# Altium PCB 电子脚铐便携式主控板V3-改版V1.PcbDoc (part 2 of 3)
Units mm, origin at the board's own origin, x right, y up, seen from the top; angles counter-clockwise.
Board outline 54 x 105 mm, 2 copper layers (Top Layer, Bottom Layer), stack 1.271 mm thick; 103 components, 64 nets, 340 pads, 43 vias.
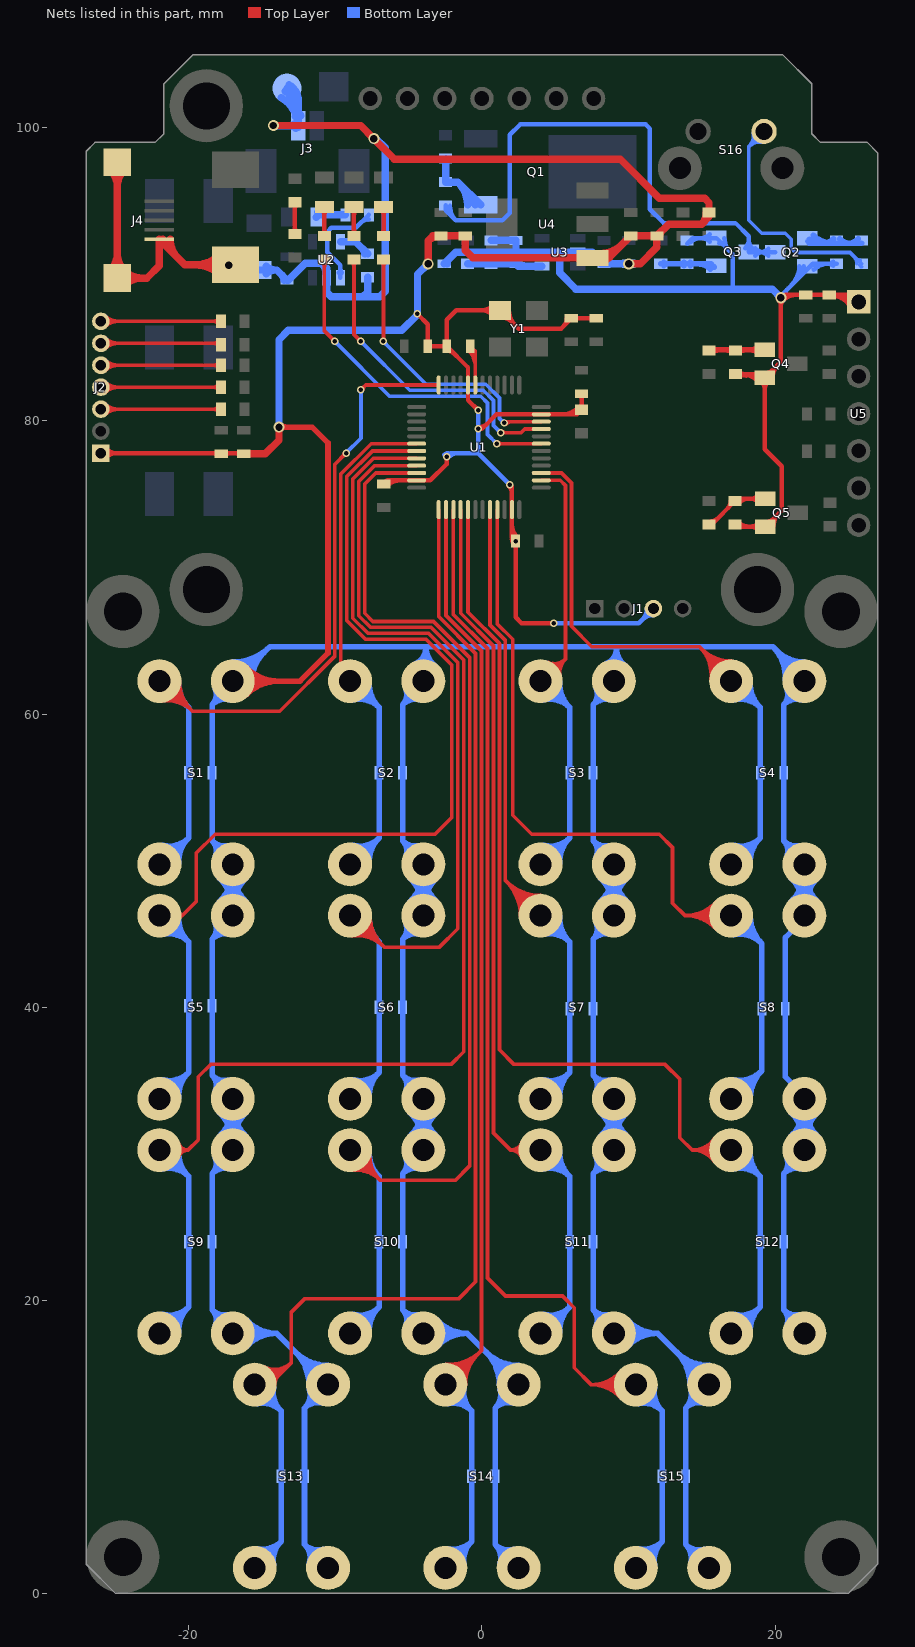
[diagram p2: the nets of this part, all layers, seen from the top]

## Via types
v1: diameter 0.508, hole 0.305, Top Layer to Bottom Layer, tented both sides, 29 vias
v2: diameter 0.762, hole 0.508, Top Layer to Bottom Layer, tented both sides, 14 vias

## Nets (pads, with @x,y where several pads share a name; then routed paths per layer and width w, separated by ;. In a path a pad name is that pad's centre, name@x,y a point inside that pad or via, vN(x,y) a via of type N, cw(c..) or ccw(c..) an arc to the next point about the centre after c; other vN are vias at no path point) (continued)
GND: C1.2 C2.2 C3.2 C4.2 C5.2 C6.2 C7.2 C8.2 C9.2 C10.2 C11.2 C12.2 C13.2 C14.2 C15.2 C16.2 C17.2 C18.2 C19.2 C20.2 C21.2 C22.2 C23.2 C24.2 C25.1 C26.2 C27.1 C28.2 C29.2 C30.2 C31.2 C32.2 C33.2 C34.2 C35.2 C36.1 D5.2 J1.3 J2.1 J3.2 J4.5 pad.@-13.3,102.7 Q2.2 Q3.2 Q4.2 Q5.2 R6.2 R13.1 R17.2 R19.2 R22.2 R23.2 R29.1 R31.1 S1.1 S2.1 S3.1 S4.1 S5.1 S6.1 S7.1 S8.1 S9.1 S10.1 S11.1 S12.1 S13.1 S14.1 S15.1 U1.8 U1.23 U1.35 U1.47 U2.2 U3.2 U4.1 U5.1 Y1.2 | length 1061.7
  Top Layer w0.305: J2.1@-26,77.8 C7.2@-16.4,77.8 ; J2.1@-25.683,77.484 cw(c-24.919,76.719) -24.919,77.8 cw(c-24.919,78.881) J2.1@-25.683,78.117 ; -18.368,77.8 cw(c-18.368,77.328) C6.2@-18.034,77.662 ; C6.2@-17.526,77.662 cw(c-17.192,77.328) -17.192,77.8 ; -16.844,77.8 cw(c-16.844,77.328) C7.2@-16.51,77.662 ; C4.2@-6.7,75.7 -6.45,75.95 U1.23@-4.45,75.95 -3.517,75.95 -2.413,77.054 v1(-2.413,77.55) ; C4.2@-6.661,75.811 cw(c-6.326,75.476) C4.2@-6.326,75.95 ; C4.2@-6.446,75.596 cw(c-5.59,74.74) -5.59,75.95 ; v1(-4.4,87.3) -3.7,86.6 C3.2@-3.7,85.1 C5.2@-2.4,85.1 ; C3.2@-3.804,85.354 ccw(c-4.056,85.606) -3.7,85.606 ccw(c-3.344,85.606) C3.2@-3.596,85.354 ; C3.2@-3.596,84.996 cw(c-3.344,84.744) -3.344,85.1 cw(c-3.344,85.456) C3.2@-3.596,85.204 ; C5.2@-2.504,84.996 ccw(c-2.756,84.744) -2.756,85.1 ccw(c-2.756,85.456) C5.2@-2.504,85.204 ; C5.2@-2.504,85.354 ccw(c-2.756,85.606) -2.4,85.606 ccw(c-2.044,85.606) C5.2@-2.296,85.354 ; C5.2@-2.4,84.802 cw(c-2.4,84.084) -1.892,84.592 ; v1(-0.254,79.455) 0,79.455 0.995,80.45 U1.47@4.05,80.45 6.488,80.45 R6.2@6.8,80.762 C1.2@6.8,81.862 ; v1@-0.254,79.557 ccw(c-0.254,80.415) 0.353,79.808 ; v1(-0.254,80.725) -0.95,81.421 U1.8@-0.95,82.45 -0.95,83.65 C5.2@-2.4,85.1 ; Y1.2@0.798,87.198 ccw(c-0.051,86.349) -0.051,87.55 ccw(c-0.051,88.751) Y1.2@0.798,87.902 ; Y1.2@1.35,87.052 cw(c1.35,86.093) 2.029,86.771 ; v1@1.833,75.573 cw(c1.31,75.05) 2.05,75.05 ; Y1.2@1.848,87.55 ccw(c3.29,87.55) 2.27,86.53 ; v1(1.905,75.645) 2.05,75.5 U1.35@2.05,73.95 2.05,72.05 v1(2.3,71.8) 2.3,66.6 2.7,66.2 v1(4.9,66.2) ; C2.2@2.044,72.09 ccw(c2.382,72.285) C2.2@2.317,71.9 ; C2.2@2.05,71.913 ccw(c2.413,71.913) C2.2@2.156,71.656 ; C2.2@2.05,72.174 ccw(c2.524,72.174) C2.2@2.189,71.839 ; 2.05,72.649 ccw(c3.149,72.649) C2.2@2.372,71.872 ; 2.05,72.91 ccw(c3.26,72.91) C2.2@2.404,72.054 ; C2.2@2.196,71.546 cw(c1.944,71.294) 2.3,71.294 cw(c2.656,71.294) C2.2@2.404,71.546 ; 5.47,80.45 ccw(c5.47,81.992) R6.2@6.56,80.902 ; 5.592,86.492 ccw(c5.084,87) C36.1@5.802,87 ; 6.206,80.45 ccw(c6.206,81.256) R6.2@6.776,80.686 ; C36.1@6.354,86.896 cw(c6.606,86.644) 6.606,87 cw(c6.606,87.356) C36.1@6.354,87.104 ; R6.2@6.66,80.902 ccw(c6.323,81.239) 6.8,81.239 ccw(c7.277,81.239) R6.2@6.94,80.902 ; C1.2@6.696,81.758 cw(c6.444,81.506) 6.8,81.506 cw(c7.156,81.506) C1.2@6.904,81.758 ; C25.1@7.546,86.896 ccw(c7.294,86.644) 7.294,87 ccw(c7.294,87.356) C25.1@7.546,87.104 ; C25.1@7.8,87 C36.1@6.1,87 5.4,86.3 2.5,86.3 Y1.2@1.25,87.55 -1.75,87.55 -2.4,86.9 C5.2@-2.4,85.1 ; R31.1@17.272,72.94 17.422,72.79 Q5.2@19.347,72.79 20.447,73.89 20.447,76.915 19.3,78.062 Q4.2@19.3,82.95 20.4,84.05 v2@20.4,88.298 ; R29.1@17.3,83.2 Q4.2@19.05,83.2 ; R29.1@17.499,83.029 cw(c17.851,82.419) 18.033,83.099 ; R31.1@17.512,73.08 ccw(c18.211,73.779) 18.211,72.79 ; R29.1@17.54,83.06 cw(c17.877,82.723) 17.877,83.2 cw(c17.877,83.677) R29.1@17.54,83.34 ; R29.1@17.657,83.2 cw(c17.657,81.507) Q4.2@18.854,82.704 ; 18.393,83.2 cw(c18.393,82.243) Q4.2@19.07,82.92 ; Q5.2@18.901,72.544 ccw(c18.308,71.951) 18.308,72.79 ccw(c18.308,73.629) Q5.2@18.901,73.036 ; Q4.2@19.054,82.704 cw(c18.461,82.111) 19.3,82.111 cw(c20.139,82.111) Q4.2@19.546,82.704 ; Q4.2@19.5,83.298 ccw(c19.5,83.654) Q4.2@19.752,83.402 ; Q5.2@19.547,73.138 ccw(c19.547,73.494) Q5.2@19.799,73.242 ; Q4.2@19.848,82.95 cw(c21.17,82.95) 20.235,83.885 ; Q5.2@19.895,72.79 cw(c21.217,72.79) 20.282,73.725 ; v2@20.238,88.238 cw(c19.848,87.848) 20.4,87.848 cw(c20.952,87.848) 20.562,88.238 cw(c21.435,87.365) 21.435,88.6 ; v2@20.702,88.6 C34.2@22.1,88.6 C35.2@23.7,88.6 ; C34.2@21.846,88.496 ccw(c21.594,88.244) 21.594,88.6 ccw(c21.594,88.956) C34.2@21.846,88.704 ; C34.2@22.354,88.496 cw(c22.606,88.244) 22.606,88.6 cw(c22.606,88.956) C34.2@22.354,88.704 ; C35.2@23.446,88.496 ccw(c23.194,88.244) 23.194,88.6 ccw(c23.194,88.956) C35.2@23.446,88.704 ; C35.2@23.954,88.496 cw(c24.206,88.244) 24.206,88.6 cw(c24.206,88.956) C35.2@23.954,88.704 ; 24.241,88.6 cw(c24.241,87.237) U5.1@25.407,87.943 ; 24.781,88.6 cw(c24.781,87.564) U5.1@25.667,88.1 ; U5.1@25.146,87.785 ccw(c23.7,86.91) C35.2@23.7,88.6 ; U5.1@25.7,88.12 25.22,88.6 C35.2@23.7,88.6
  Top Layer w0.381: S1.1@-16.808,62.25 -12.415,62.25 -10.502,64.163 -10.502,78.502 -11.582,79.582 v2(-13.843,79.582) ; S1.1@-16.343,61.593 cw(c-14.758,60.008) -14.758,62.25 cw(c-14.758,64.492) S1.1@-16.343,62.907 ; S1.1@-16.074,61.324 cw(c-13.839,59.089) -13.839,62.25 cw(c-13.839,65.411) S1.1@-16.074,63.176 ; v2@-13.708,79.447 cw(c-13.383,79.122) -13.383,79.582 cw(c-13.383,80.042) v2@-13.708,79.717
  Top Layer w0.508: J4.5@-25.371,90.242 ccw(c-26.559,91.43) -24.879,91.43 ccw(c-23.199,91.43) -24.387,90.242 ccw(c-23.199,91.43) -23.199,89.75 ccw(c-23.199,88.07) J4.5@-24.387,89.258 ; J4.5@-25.371,97.158 cw(c-26.559,95.97) -24.879,95.97 cw(c-23.199,95.97) J4.5@-24.387,97.158 ; J4.5@-24.879,97.65 J4.5@-24.879,89.75 -22.85,89.75 -22.004,90.596 J4.5@-22.004,92.383 ; J4.5@-22.021,92.4 J4.5@-22.004,92.383 ; J4.5@-21.783,92.4 ccw(c-21.208,92.4) -21.615,91.994 ; J4.5@-21.275,92.4 ccw(c-19.474,92.4) -20.748,91.126 ; D5.2@-17.854,89.946 ccw(c-19.555,88.245) -19.555,90.65 ccw(c-19.555,93.055) D5.2@-17.854,91.354 ; D5.2@-16.8,90.65 -20.271,90.65 J4.5@-22.004,92.383 ; C7.2@-16.256,77.766 -14.77,77.766 -13.843,78.693 v2(-13.843,79.582) ; v2(-14.224,100.156) -8.255,100.156 v2(-7.366,99.267) -5.969,97.87 9.43,97.87 12.1,95.2 15.194,95.2 15.494,94.9 R23.2@15.494,94.225 15.494,93.933 14.986,93.425 ; v2(-3.671,90.719) -3.671,92.294 ; C32.2@-2.946,92.579 ccw(c-2.981,91.604) -3.671,92.294 ; C33.2@-1.359,92.625 C32.2@-2.794,92.625 -3.34,92.625 -3.671,92.294 ; C33.2@-1.143,92.625 -1.143,91.647 -0.621,91.125 U4.1@7.545,91.125 8.66,91.125 ; U4.1@6.811,90.916 ccw(c6.305,90.41) 6.305,91.125 ccw(c6.305,91.84) U4.1@6.811,91.334 ; U4.1@8.07,90.913 ccw(c8.07,91.826) 8.715,91.18 ; U4.1@8.07,91.421 ccw(c8.07,93.56) 9.583,92.047 ; U4.1@8.307,90.948 cw(c8.66,90.685) 8.66,91.125 ; U4.1@8.307,91.302 ccw(c8.66,91.565) 8.66,91.125 ; 9.825,92.29 ccw(c9.491,92.625) C31.2@9.964,92.625 ; v2(10.024,90.719) 10.819,90.719 11.938,91.838 C30.2@11.938,92.625 ; C30.2@12.134,92.625 cw(c12.607,92.625) 12.273,92.96 ; R23.2@15.298,94.221 cw(c14.231,94.18) 14.986,93.425 ; v2@20.4,88.298 v2(20.4,88.4) ; 8.66,91.125 C31.2@10.16,92.625 C30.2@11.938,92.625 ; C30.2@11.938,92.625 12.738,93.425 14.986,93.425
  Bottom Layer w0.305: v1@-2.557,77.694 cw(c-2.29,77.427) -2.29,77.804 ; v1(-2.413,77.55) -2.159,77.804 -0.254,77.804 ; v1@-2.341,77.478 cw(c-1.555,76.692) -1.555,77.804 ; v1(-0.254,80.725) v1(-0.254,79.455) -0.254,77.804 ; v1(1.905,75.645) -0.254,77.804 ; v1(4.9,66.2) 10.7,66.2 J1.3@11.7,67.2 ; J1.3@11.252,67.2 cw(c10.172,67.2) 10.936,66.436 cw(c11.7,65.672) J1.3@11.7,66.752 ; R19.2@14,92.1 14.381,92.481 Q3.2@16,92.481 17.1,91.381 17.1,89 ; R19.2@14.24,92.179 cw(c14.967,91.452) 14.967,92.481 ; Q3.2@15.554,92.235 ccw(c14.961,91.641) 14.961,92.481 ccw(c14.961,93.32) Q3.2@15.554,92.726 ; Q3.2@16.2,92.133 cw(c16.2,91.777) Q3.2@16.452,92.029 ; Q3.2@16.548,92.481 ccw(c17.87,92.481) 16.935,91.546 ; v2(20.4,88.4) 20.4,88.55 22.569,90.719 R17.2@24.2,90.719 ; v2@20.629,88.4 cw(c21.543,88.4) 20.896,89.046 ; 21.119,89.269 ccw(c19.83,90.557) Q2.2@21.652,90.557 ; 21.639,89.789 ccw(c20.87,90.557) Q2.2@21.957,90.557 ; Q2.2@22.43,90.527 cw(c22.893,90.064) Q2.2@22.893,90.719 ; Q2.2@22.646,90.312 cw(c23.629,89.328) 23.629,90.719 ; R17.2@23.96,90.579 ccw(c23.623,90.242) 23.623,90.719 ccw(c23.623,91.196) R17.2@23.96,90.859
  Bottom Layer w0.381: S9.1@-18.203,18.267 ccw(c-19.11,18.656) -18.412,19.354 ; S9.1@-18.203,29.733 cw(c-19.11,29.344) -18.412,28.646 ; S5.1@-18.203,34.267 ccw(c-19.11,34.656) -18.412,35.354 ; S5.1@-18.203,45.733 cw(c-19.11,45.344) -18.412,44.646 ; S1.1@-18.203,50.267 ccw(c-19.11,50.656) -18.412,51.354 ; S1.1@-18.203,61.733 cw(c-19.11,61.344) -18.412,60.646 ; -18.014,18.956 cw(c-18.553,18.417) S9.1@-17.853,18.117 ; -18.014,29.044 ccw(c-18.553,29.583) S9.1@-17.853,29.883 ; -18.014,34.956 cw(c-18.553,34.417) S5.1@-17.853,34.117 ; -18.014,45.044 ccw(c-18.553,45.583) S5.1@-17.853,45.883 ; -18.014,50.956 cw(c-18.553,50.417) S1.1@-17.853,50.117 ; -18.014,61.044 ccw(c-18.553,61.583) S1.1@-17.853,61.883 ; S9.1@-17.926,31.176 ccw(c-20.161,33.411) -17,33.411 ccw(c-13.839,33.411) S9.1@-16.074,31.176 ; S5.1@-17.926,32.824 cw(c-20.161,30.589) -17,30.589 cw(c-13.839,30.589) S5.1@-16.074,32.824 ; S5.1@-17.926,47.176 ccw(c-20.161,49.411) -17,49.411 ccw(c-13.839,49.411) S5.1@-16.074,47.176 ; S1.1@-17.926,48.824 cw(c-20.161,46.589) -17,46.589 cw(c-13.839,46.589) S1.1@-16.074,48.824 ; S9.1@-17.657,30.907 ccw(c-19.242,32.492) -17,32.492 ccw(c-14.758,32.492) S9.1@-16.343,30.907 ; S5.1@-17.657,33.093 cw(c-19.242,31.508) -17,31.508 cw(c-14.758,31.508) S5.1@-16.343,33.093 ; S5.1@-17.657,46.907 ccw(c-19.242,48.492) -17,48.492 ccw(c-14.758,48.492) S5.1@-16.343,46.907 ; S1.1@-17.657,49.093 cw(c-19.242,47.508) -17,47.508 cw(c-14.758,47.508) S1.1@-16.343,49.093 ; S9.1@-17.649,31.387 ccw(c-17.929,31.877) -17.384,32.023 ccw(c-16.762,32.189) S9.1@-16.84,31.55 ; S5.1@-17.649,47.387 ccw(c-17.929,47.877) -17.384,48.023 ccw(c-16.762,48.189) S5.1@-16.84,47.55 ; S9.1@-17.466,31.474 ccw(c-17.649,31.952) -17.154,32.084 ccw(c-16.333,32.304) S9.1@-16.595,31.495 ; S5.1@-17.466,47.474 ccw(c-17.649,47.952) -17.154,48.084 ccw(c-16.333,48.304) S5.1@-16.595,47.495 ; S9.1@-17.404,31.495 ccw(c-17.667,32.304) -16.846,32.084 ccw(c-16.351,31.952) S9.1@-16.534,31.474 ; S5.1@-17.404,47.495 ccw(c-17.667,48.304) -16.846,48.084 ccw(c-16.351,47.952) S5.1@-16.534,47.474 ; S9.1@-17.287,19.028 cw(c-17.553,20.213) -18.412,19.354 ; S9.1@-17.287,28.972 ccw(c-17.553,27.787) -18.412,28.646 ; S5.1@-17.287,35.028 cw(c-17.553,36.213) -18.412,35.354 ; S5.1@-17.287,44.972 ccw(c-17.553,43.787) -18.412,44.646 ; S1.1@-17.287,51.028 cw(c-17.553,52.213) -18.412,51.354 ; S1.1@-17.287,60.972 ccw(c-17.553,59.787) -18.412,60.646 ; S9.1@-17.16,31.55 ccw(c-17.238,32.189) -16.616,32.023 ccw(c-16.071,31.877) S9.1@-16.351,31.387 ; S5.1@-17.16,47.55 ccw(c-17.238,48.189) -16.616,48.023 ccw(c-16.071,47.877) S5.1@-16.351,47.387 ; S9.1@-17,17.75 S9.1@-16.808,17.75 ; S9.1@-17,30.25 S5.1@-17,33.75 ; S5.1@-17,46.25 -17,49.558 -16.808,49.75 -18.412,51.354 ; S1.1@-16.997,62.797 ccw(c-16.986,64.548) -15.748,63.31 ; S1.1@-16.994,63.178 ccw(c-16.978,65.83) -15.103,63.955 ; S1.1@-16.992,63.559 ccw(c-16.97,67.112) -14.458,64.6 ; S9.1@-16.808,30.25 -18.412,28.646 ; S5.1@-16.808,33.75 -18.412,35.354 ; S5.1@-16.808,46.25 -18.412,44.646 ; S9.1@-16.319,17.119 cw(c-14.873,15.778) -14.873,17.75 cw(c-14.873,19.722) S9.1@-16.319,18.381 ; S1.1@-16.071,62.25 cw(c-14.293,62.25) -15.551,63.507 ; S9.1@-16.04,16.86 cw(c-14,14.969) -14,17.75 ; S9.1@-16.04,18.64 ccw(c-14,20.531) -14,17.75 ; S1.1@-15.69,62.25 cw(c-12.993,62.25) -14.9,64.158 ; S13.1@-11.809,14.25 ccw(c-14.971,14.25) -12.735,16.485 ccw(c-10.5,18.721) S13.1@-10.5,15.56 ; S13.1@-11.765,2.089 ccw(c-13.03,2.428) -12.104,3.354 ; S13.1@-11.765,13.911 cw(c-13.03,13.572) -12.104,12.646 cw(c-11.178,11.72) S13.1@-10.839,12.985 ; S13.1@-11.428,14.25 ccw(c-13.67,14.25) -12.085,15.835 ccw(c-10.5,17.42) S13.1@-10.5,15.179 ; S13.1@-11.397,1.99 ccw(c-12.294,2.231) -11.637,2.887 ccw(c-10.981,3.544) S13.1@-10.74,2.647 ; S13.1@-11.397,14.01 cw(c-12.294,13.769) -11.637,13.113 cw(c-10.981,12.456) S13.1@-10.74,13.353 ; S13.1@-10.839,3.015 cw(c-11.178,4.28) -12.104,3.354 ; S13.1@-10.5,1.75 -12.104,3.354 ; S10.1@-5.203,18.267 ccw(c-6.11,18.656) -5.412,19.354 ; S10.1@-5.203,29.733 cw(c-6.11,29.344) -5.412,28.646 ; S6.1@-5.203,34.267 ccw(c-6.11,34.656) -5.412,35.354 ; S6.1@-5.203,45.733 cw(c-6.11,45.344) -5.412,44.646 ; S2.1@-5.203,50.267 ccw(c-6.11,50.656) -5.412,51.354 ; S2.1@-5.203,61.733 cw(c-6.11,61.344) -5.412,60.646 ; -5.014,18.956 cw(c-5.553,18.417) S10.1@-4.853,18.117 ; -5.014,29.044 ccw(c-5.553,29.583) S10.1@-4.853,29.883 ; -5.014,34.956 cw(c-5.553,34.417) S6.1@-4.853,34.117 ; -5.014,45.044 ccw(c-5.553,45.583) S6.1@-4.853,45.883 ; -5.014,50.956 cw(c-5.553,50.417) S2.1@-4.853,50.117 ; -5.014,61.044 ccw(c-5.553,61.583) S2.1@-4.853,61.883 ; S10.1@-4.926,31.176 ccw(c-7.161,33.411) -4,33.411 ccw(c-0.839,33.411) S10.1@-3.074,31.176 ; S6.1@-4.926,32.824 cw(c-7.161,30.589) -4,30.589 cw(c-0.839,30.589) S6.1@-3.074,32.824 ; S6.1@-4.926,47.176 ccw(c-7.161,49.411) -4,49.411 ccw(c-0.839,49.411) S6.1@-3.074,47.176 ; S2.1@-4.926,48.824 cw(c-7.161,46.589) -4,46.589 cw(c-0.839,46.589) S2.1@-3.074,48.824 ; S10.1@-4.657,30.907 ccw(c-6.242,32.492) -4,32.492 ccw(c-1.758,32.492) S10.1@-3.343,30.907 ; S6.1@-4.657,33.093 cw(c-6.242,31.508) -4,31.508 cw(c-1.758,31.508) S6.1@-3.343,33.093 ; S6.1@-4.657,46.907 ccw(c-6.242,48.492) -4,48.492 ccw(c-1.758,48.492) S6.1@-3.343,46.907 ; S2.1@-4.657,49.093 cw(c-6.242,47.508) -4,47.508 cw(c-1.758,47.508) S2.1@-3.343,49.093 ; S10.1@-4.649,31.387 ccw(c-4.929,31.877) -4.384,32.023 ccw(c-3.762,32.189) S10.1@-3.84,31.55 ; S6.1@-4.649,47.387 ccw(c-4.929,47.877) -4.384,48.023 ccw(c-3.762,48.189) S6.1@-3.84,47.55 ; S2.1@-4.547,63.44 ccw(c-5.076,64.592) -3.808,64.592 ; S10.1@-4.466,31.474 ccw(c-4.649,31.952) -4.154,32.084 ccw(c-3.333,32.304) S10.1@-3.595,31.495 ; S6.1@-4.466,47.474 ccw(c-4.649,47.952) -4.154,48.084 ccw(c-3.333,48.304) S6.1@-3.595,47.495 ; S10.1@-4.404,31.495 ccw(c-4.667,32.304) -3.846,32.084 ccw(c-3.351,31.952) S10.1@-3.534,31.474 ; S6.1@-4.404,47.495 ccw(c-4.667,48.304) -3.846,48.084 ccw(c-3.351,47.952) S6.1@-3.534,47.474 ; S2.1@-4.388,63.094 ccw(c-4.803,63.998) -3.808,63.998 ; S10.1@-4.287,19.028 cw(c-4.553,20.213) -5.412,19.354 ; S10.1@-4.287,28.972 ccw(c-4.553,27.787) -5.412,28.646 ; S6.1@-4.287,35.028 cw(c-4.553,36.213) -5.412,35.354 ; S6.1@-4.287,44.972 ccw(c-4.553,43.787) -5.412,44.646 ; S2.1@-4.287,51.028 cw(c-4.553,52.213) -5.412,51.354 ; S2.1@-4.287,60.972 ccw(c-4.553,59.787) -5.412,60.646 ; S10.1@-4.16,31.55 ccw(c-4.238,32.189) -3.616,32.023 ccw(c-3.071,31.877) S10.1@-3.351,31.387 ; S6.1@-4.16,47.55 ccw(c-4.238,48.189) -3.616,48.023 ccw(c-3.071,47.877) S6.1@-3.351,47.387 ; S10.1@-4,17.75 S10.1@-3.808,17.75 ; S10.1@-4,30.25 S6.1@-4,33.75 ; S6.1@-4,46.25 -4,49.558 -3.808,49.75 -5.412,51.354 ; S10.1@-3.808,30.25 -5.412,28.646 ; S6.1@-3.808,33.75 -5.412,35.354 ; S6.1@-3.808,46.25 -5.412,44.646 ; -3.808,63.793 ccw(c-2.751,63.793) S2.1@-3.416,62.972 ; S10.1@-3.319,17.119 cw(c-1.873,15.778) -1.873,17.75 cw(c-1.873,19.722) S10.1@-3.319,18.381 ; S2.1@-3.176,63.268 cw(c-2.105,64.592) -3.808,64.592 ; S10.1@-3.04,16.86 cw(c-1,14.969) -1,17.75 cw(c-1,20.531) S10.1@-3.04,18.64 ; S14.1@1.191,14.25 ccw(c-1.971,14.25) 0.265,16.485 ccw(c2.5,18.721) S14.1@2.5,15.56 ; S14.1@1.235,2.089 ccw(c-0.03,2.428) 0.896,3.354 ; S14.1@1.235,13.911 cw(c-0.03,13.572) 0.896,12.646 cw(c1.822,11.72) S14.1@2.161,12.985 ; S14.1@1.572,14.25 ccw(c-0.67,14.25) 0.915,15.835 ccw(c2.5,17.42) S14.1@2.5,15.179 ; S14.1@1.603,1.99 ccw(c0.706,2.231) 1.363,2.887 ccw(c2.019,3.544) S14.1@2.26,2.647 ; S14.1@1.603,14.01 cw(c0.706,13.769) 1.363,13.113 cw(c2.019,12.456) S14.1@2.26,13.353 ; S14.1@2.161,3.015 cw(c1.822,4.28) 0.896,3.354 ; S14.1@2.5,1.75 0.896,3.354 ; S11.1@7.797,18.267 ccw(c6.89,18.656) 7.588,19.354 ; S11.1@7.797,29.733 cw(c6.89,29.344) 7.588,28.646 ; S7.1@7.797,34.267 ccw(c6.89,34.656) 7.588,35.354 ; S7.1@7.797,45.733 cw(c6.89,45.344) 7.588,44.646 ; S3.1@7.797,50.267 ccw(c6.89,50.656) 7.588,51.354 ; S3.1@7.797,61.733 cw(c6.89,61.344) 7.588,60.646 ; 7.986,18.956 cw(c7.447,18.417) S11.1@8.147,18.117 ; 7.986,29.044 ccw(c7.447,29.583) S11.1@8.147,29.883 ; 7.986,34.956 cw(c7.447,34.417) S7.1@8.147,34.117 ; 7.986,45.044 ccw(c7.447,45.583) S7.1@8.147,45.883 ; 7.986,50.956 cw(c7.447,50.417) S3.1@8.147,50.117 ; 7.986,61.044 ccw(c7.447,61.583) S3.1@8.147,61.883 ; S11.1@8.074,31.176 ccw(c5.839,33.411) 9,33.411 ccw(c12.161,33.411) S11.1@9.926,31.176 ; S7.1@8.074,32.824 cw(c5.839,30.589) 9,30.589 cw(c12.161,30.589) S7.1@9.926,32.824 ; S7.1@8.074,47.176 ccw(c5.839,49.411) 9,49.411 ccw(c12.161,49.411) S7.1@9.926,47.176 ; S3.1@8.074,48.824 cw(c5.839,46.589) 9,46.589 cw(c12.161,46.589) S3.1@9.926,48.824 ; S11.1@8.343,30.907 ccw(c6.758,32.492) 9,32.492 ccw(c11.242,32.492) S11.1@9.657,30.907 ; S7.1@8.343,33.093 cw(c6.758,31.508) 9,31.508 cw(c11.242,31.508) S7.1@9.657,33.093 ; S7.1@8.343,46.907 ccw(c6.758,48.492) 9,48.492 ccw(c11.242,48.492) S7.1@9.657,46.907 ; S3.1@8.343,49.093 cw(c6.758,47.508) 9,47.508 cw(c11.242,47.508) S3.1@9.657,49.093 ; S11.1@8.351,31.387 ccw(c8.071,31.877) 8.616,32.023 ccw(c9.238,32.189) S11.1@9.16,31.55 ; S7.1@8.351,47.387 ccw(c8.071,47.877) 8.616,48.023 ccw(c9.238,48.189) S7.1@9.16,47.55 ; S3.1@8.501,63.461 ccw(c8.077,64.492) 9.192,64.492 ; S11.1@8.534,31.474 ccw(c8.351,31.952) 8.846,32.084 ccw(c9.667,32.304) S11.1@9.405,31.495 ; S7.1@8.534,47.474 ccw(c8.351,47.952) 8.846,48.084 ccw(c9.667,48.304) S7.1@9.405,47.495 ; S11.1@8.595,31.495 ccw(c8.333,32.304) 9.154,32.084 ccw(c9.649,31.952) S11.1@9.466,31.474 ; S7.1@8.596,47.495 ccw(c8.333,48.304) 9.154,48.084 ccw(c9.649,47.952) S7.1@9.466,47.474 ; S3.1@8.647,63.109 ccw(c8.311,63.923) 9.192,63.923 ; S11.1@8.713,19.028 cw(c8.447,20.213) 7.588,19.354 ; S11.1@8.713,28.972 ccw(c8.447,27.787) 7.588,28.646 ; S7.1@8.713,35.028 cw(c8.447,36.213) 7.588,35.354 ; S7.1@8.713,44.972 ccw(c8.447,43.787) 7.588,44.646 ; S3.1@8.713,51.028 cw(c8.447,52.213) 7.588,51.354 ; S3.1@8.713,60.972 ccw(c8.447,59.787) 7.588,60.646 ; S11.1@8.84,31.55 ccw(c8.762,32.189) 9.384,32.023 ccw(c9.929,31.877) S11.1@9.649,31.387 ; S7.1@8.84,47.55 ccw(c8.762,48.189) 9.384,48.023 ccw(c9.929,47.877) S7.1@9.649,47.387 ; S11.1@9,17.75 S11.1@9.192,17.75 ; S11.1@9,30.25 S7.1@9,33.75 ; S7.1@9,46.25 9,49.558 9.192,49.75 7.588,51.354 ; S11.1@9.192,30.25 7.588,28.646 ; S7.1@9.192,33.75 7.588,35.354 ; S7.1@9.192,46.25 7.588,44.646 ; S11.1@9.681,17.119 cw(c11.127,15.778) 11.127,17.75 cw(c11.127,19.722) S11.1@9.681,18.381 ; S3.1@9.788,63.296 cw(c10.69,64.492) 9.192,64.492 ; S11.1@9.96,16.86 cw(c12,14.969) 12,17.75 ; S11.1@9.96,18.64 ccw(c12,20.531) 12,17.75 ; S15.1@14.191,14.25 ccw(c11.029,14.25) 13.265,16.485 ccw(c15.5,18.721) S15.1@15.5,15.56 ; S15.1@14.235,2.089 ccw(c12.97,2.428) 13.896,3.354 ; S15.1@14.235,13.911 cw(c12.97,13.572) 13.896,12.646 cw(c14.822,11.72) S15.1@15.161,12.985 ; S15.1@14.572,14.25 ccw(c12.33,14.25) 13.915,15.835 ccw(c15.5,17.42) S15.1@15.5,15.179 ; S15.1@14.603,1.99 ccw(c13.706,2.231) 14.363,2.887 ccw(c15.019,3.544) S15.1@15.26,2.647 ; S15.1@14.603,14.01 cw(c13.706,13.769) 14.363,13.113 cw(c15.019,12.456) S15.1@15.26,13.353 ; S15.1@15.161,3.015 cw(c14.822,4.28) 13.896,3.354 ; S15.1@15.5,1.75 13.896,3.354 ; 20.092,64.35 ccw(c22,66.257) S4.1@22,63.56 ; 20.436,64.006 cw(c18.886,62.456) S4.1@21.074,62.311 ; S4.1@20.693,62.336 ccw(c17.772,62.529) 19.842,64.6 ; 20.743,63.699 ccw(c22,64.957) S4.1@22,63.179 ; S12.1@20.797,18.267 ccw(c19.89,18.656) 20.588,19.354 ; S12.1@20.797,29.733 cw(c19.89,29.344) 20.588,28.646 ; S4.1@20.797,50.267 ccw(c19.89,50.656) 20.588,51.354 ; S4.1@20.797,61.733 cw(c19.89,61.344) 20.588,60.646 ; 20.986,18.956 cw(c20.447,18.417) S12.1@21.147,18.117 ; 20.986,29.044 ccw(c20.447,29.583) S12.1@21.147,29.883 ; 20.986,50.956 cw(c20.447,50.417) S4.1@21.147,50.117 ; 20.986,61.044 ccw(c20.447,61.583) S4.1@21.147,61.883 ; 21.03,63.412 cw(c20.001,62.382) S4.1@21.454,62.286 ; S12.1@21.074,31.176 ccw(c18.839,33.411) 22,33.411 ccw(c25.161,33.411) S12.1@22.926,31.176 ; S8.1@21.074,32.824 cw(c18.839,30.589) 22,30.589 cw(c25.161,30.589) S8.1@22.926,32.824 ; S8.1@21.074,47.176 ccw(c18.839,49.411) 22,49.411 ccw(c25.161,49.411) S8.1@22.926,47.176 ; S4.1@21.074,48.824 cw(c18.839,46.589) 22,46.589 cw(c25.161,46.589) S4.1@22.926,48.824 ; S12.1@21.343,30.907 ccw(c19.758,32.492) 22,32.492 ccw(c24.242,32.492) S12.1@22.657,30.907 ; S8.1@21.343,33.093 cw(c19.758,31.508) 22,31.508 cw(c24.242,31.508) S8.1@22.657,33.093 ; S8.1@21.343,46.907 ccw(c19.758,48.492) 22,48.492 ccw(c24.242,48.492) S8.1@22.657,46.907 ; S4.1@21.343,49.093 cw(c19.758,47.508) 22,47.508 cw(c24.242,47.508) S4.1@22.657,49.093 ; S12.1@21.351,31.387 ccw(c21.071,31.877) 21.616,32.023 ccw(c22.238,32.189) S12.1@22.16,31.55 ; S8.1@21.351,47.387 ccw(c21.071,47.877) 21.616,48.023 ccw(c22.238,48.189) S8.1@22.16,47.55 ; S12.1@21.534,31.474 ccw(c21.351,31.952) 21.846,32.084 ccw(c22.667,32.304) S12.1@22.405,31.495 ; S8.1@21.534,47.474 ccw(c21.351,47.952) 21.846,48.084 ccw(c22.667,48.304) S8.1@22.405,47.495 ; S12.1@21.595,31.495 ccw(c21.333,32.304) 22.154,32.084 ccw(c22.649,31.952) S12.1@22.466,31.474 ; S8.1@21.595,47.495 ccw(c21.333,48.304) 22.154,48.084 ccw(c22.649,47.952) S8.1@22.466,47.474 ; S12.1@21.713,19.028 cw(c21.447,20.213) 20.588,19.354 ; S12.1@21.713,28.972 ccw(c21.447,27.787) 20.588,28.646 ; S4.1@21.713,51.028 cw(c21.447,52.213) 20.588,51.354 ; S4.1@21.713,60.972 ccw(c21.447,59.787) 20.588,60.646 ; S12.1@21.84,31.55 ccw(c21.762,32.189) 22.384,32.023 ccw(c22.929,31.877) S12.1@22.649,31.387 ; S8.1@21.84,47.55 ccw(c21.762,48.189) 22.384,48.023 ccw(c22.929,47.877) S8.1@22.649,47.387 ; S12.1@22,30.25 S8.1@22,33.75 ; S8.1@22,46.25 S4.1@22,49.75 ; S12.1@22.192,17.75 20.588,19.354 ; S12.1@22.192,30.25 20.588,28.646 ; S8.1@22.192,33.75 20.7,35.242 C15.2@20.7,39.9 20.7,44.758 S8.1@22.192,46.25 ; S4.1@22.192,49.75 20.588,51.354 ; -18.412,19.354 S9.1@-16.808,17.75 ; -18.412,19.354 C16.2@-18.412,24 -18.412,28.646 ; -18.412,35.354 C12.2@-18.412,40.1 -18.412,44.646 ; -18.412,51.354 C8.2@-18.412,56 -18.412,60.646 ; -18.412,60.646 -14.458,64.6 ; S9.1@-16.808,17.75 -14,17.75 ; -14.458,64.6 19.842,64.6 ; -14,17.75 S13.1@-10.5,14.25 -12.104,12.646 C20.2@-12.104,8 -12.104,3.354 ; -5.412,19.354 S10.1@-3.808,17.75 ; -5.412,19.354 C17.2@-5.412,24 -5.412,28.646 ; -5.412,35.354 C13.2@-5.412,40 -5.412,44.646 ; -5.412,51.354 C9.2@-5.412,56 -5.412,60.646 ; -5.412,60.646 -3.808,62.25 -3.808,64.592 ; S10.1@-3.808,17.75 -1,17.75 S14.1@2.5,14.25 0.896,12.646 C21.2@0.896,8 0.896,3.354 ; 7.588,19.354 S11.1@9.192,17.75 ; 7.588,19.354 C18.2@7.588,24 7.588,28.646 ; 7.588,35.354 C14.2@7.588,39.9 7.588,44.646 ; 7.588,51.354 C10.2@7.588,56 7.588,60.646 ; 7.588,60.646 9.192,62.25 9.192,64.492 ; S11.1@9.192,17.75 12,17.75 ; 12,17.75 S15.1@15.5,14.25 13.896,12.646 C22.2@13.896,8 13.896,3.354 ; 19.842,64.6 22.192,62.25 20.588,60.646 ; 20.588,19.354 C19.2@20.588,24 20.588,28.646 ; 20.588,51.354 C11.2@20.588,56 20.588,60.646
  Bottom Layer w0.508: v2(-17.272,90.631) -16.941,90.3 -14,90.3 C24.2@-13.3,89.6 -13.223,89.6 -12.065,90.758 -10.922,90.758 ; v2@-17.182,90.721 ccw(c-16.166,91.737) -16.166,90.3 ; C23.2@-15.695,90.055 ccw(c-16.285,89.465) -16.285,90.3 ccw(c-16.285,91.135) C23.2@-15.695,90.545 ; C23.2@-14.705,90.055 cw(c-14.115,89.465) -14.115,90.3 cw(c-14.115,91.135) C23.2@-14.705,90.545 ; v2@-14.218,100.15 J3.2@-12.525,100.15 -12.525,101.925 pad.@-13.3,102.7 ; v2(-13.843,79.582) -13.843,85.551 -13.208,86.186 -5.461,86.186 -4.394,87.253 -4.394,89.996 v2(-3.671,90.719) ; pad.@-13.679,102.058 cw(c-14.874,100.035) J3.2@-12.525,100.035 ; -13.635,89.935 cw(c-13.969,89.6) C24.2@-13.496,89.6 ; pad.@-13.421,102.495 cw(c-14.349,100.925) J3.2@-12.525,100.925 ; pad.@-13.163,102.932 cw(c-13.823,101.815) -12.525,101.815 ; J3.2@-12.738,100.773 ccw(c-13.463,101.192) -12.655,101.408 ; J3.2@-12.699,99.976 ccw(c-13.119,99.556) -13.119,100.15 ccw(c-13.119,100.744) J3.2@-12.699,100.324 ; J3.2@-12.699,100.824 ccw(c-13.119,101.244) -12.525,101.244 ccw(c-11.931,101.244) J3.2@-12.351,100.824 ; U2.2@-10.646,90.004 ccw(c-11.597,90.083) -10.922,90.758 ; R13.1@-7.8,89.8 -7.8,88.8 -8.128,88.472 ; v2@-7.366,99.14 cw(c-7.366,98.527) -6.932,98.96 ; v2(-7.366,99.267) -7.239,99.267 -6.604,98.632 -6.604,88.853 -6.985,88.472 -8.128,88.472 ; C28.2@-2.576,90.719 -1.775,91.52 5.3,91.52 ; C28.2@-2.38,90.719 cw(c-1.907,90.719) -2.241,91.054 ; R22.2@0.624,92.319 C29.2@2.324,92.319 2.324,91.583 ; 7.989,91.054 cw(c7.655,90.719) C27.1@8.128,90.719 ; v2(10.024,90.719) C27.1@8.324,90.719 7.524,91.519 U3.2@6.549,91.519 U3.2@6.549,91.519 5.3,91.52 ; v2(20.4,88.4) 19.8,89 17.1,89 6.4,89 5.3,90.1 5.3,91.52 ; -10.922,90.758 -10.6,90.436 U2.2@-10.6,89.775 -10.6,88.785 -10.287,88.472 -8.128,88.472
KEY1: C8.1 S1.2 U1.12 | length 79.5
  Top Layer w0.254: S1.2@-21.916,61.645 cw(c-21.742,60.384) -20.842,61.284 ; S1.2@-21.882,61.393 cw(c-21.654,59.749) -20.481,60.923 ; S1.2@-21.847,61.142 cw(c-21.567,59.114) -20.119,60.561 ; S1.2@-21.812,60.89 cw(c-21.479,58.479) -19.758,60.2 ; S1.2@-21.808,62.25 -19.758,60.2 ; S1.2@-21.135,62.25 ccw(c-19.51,62.25) -20.659,61.101 ; S1.2@-20.881,62.25 ccw(c-18.643,62.25) -20.226,60.668 ; S1.2@-20.627,62.25 ccw(c-17.776,62.25) -19.792,60.234 ; v1@-9.398,77.804 cw(c-9.705,77.804) -9.488,77.587 cw(c-9.271,77.37) v1@-9.271,77.677 ; v1(-9.271,77.804) -10.032,77.043 -10.032,63.968 -13.8,60.2 -19.758,60.2 ; v1(-8.255,82.122) -7.927,82.45 U1.12@-2.95,82.45 ; v1@-8.255,82.249 ccw(c-8.255,82.556) -8.038,82.339 ccw(c-7.821,82.122) v1@-8.128,82.122
  Bottom Layer w0.254: v1(-9.271,77.804) -8.255,78.82 v1(-8.255,82.122) ; v1@-9.271,77.931 ccw(c-9.271,78.238) -9.054,78.021 ccw(c-8.837,77.804) v1@-9.144,77.804 ; v1@-8.345,82.032 cw(c-8.562,81.815) -8.255,81.815 cw(c-7.948,81.815) v1@-8.165,82.032
  Bottom Layer w0.381: S1.2@-21.811,50.659 ccw(c-21.52,52.056) -20.511,51.047 ; S1.2@-21.811,61.341 cw(c-21.52,59.944) -20.511,60.953 ; S1.2@-21.808,49.75 -20.012,51.546 ; S1.2@-21.808,62.25 -20.012,60.454 ; S1.2@-21.733,51.032 ccw(c-21.348,52.882) -20.012,51.546 ; S1.2@-21.733,60.968 cw(c-21.348,59.118) -20.012,60.454 ; S1.2@-21.072,49.788 cw(c-19.546,49.852) -20.626,50.932 ; S1.2@-21.072,62.212 ccw(c-19.546,62.148) -20.626,61.068 ; S1.2@-20.692,49.804 cw(c-18.367,49.901) -20.012,51.546 ; S1.2@-20.692,62.196 ccw(c-18.367,62.099) -20.012,60.454 ; -20.012,51.546 C8.1@-20.012,56 -20.012,60.454
KEY2: C9.1 S2.2 U1.18 | length 47.4
  Top Layer w0.254: S2.2@-8.808,62.25 -8.808,62.708 -9.626,63.526 -9.626,76.373 -7.549,78.45 U1.18@-4.45,78.45
  Bottom Layer w0.381: S2.2@-8.811,50.659 ccw(c-8.52,52.056) -7.511,51.047 ; S2.2@-8.811,61.341 cw(c-8.52,59.944) -7.511,60.953 ; S2.2@-8.808,49.75 -7.012,51.546 ; S2.2@-8.808,62.25 -7.012,60.454 ; S2.2@-8.733,51.032 ccw(c-8.348,52.882) -7.012,51.546 ; S2.2@-8.733,60.968 cw(c-8.348,59.118) -7.012,60.454 ; S2.2@-8.072,49.788 cw(c-6.546,49.852) -7.626,50.932 ; S2.2@-8.072,62.212 ccw(c-6.546,62.148) -7.626,61.068 ; S2.2@-7.692,49.804 cw(c-5.367,49.901) -7.012,51.546 ; S2.2@-7.692,62.196 ccw(c-5.367,62.099) -7.012,60.454 ; -7.012,51.546 C9.1@-7.012,56 -7.012,60.454
KEY3: C10.1 S3.2 U1.38 | length 48.3
  Top Layer w0.254: U1.38@4.05,75.95 5.35,75.95 5.7,75.6 5.7,63.758 ; S3.2@4.192,62.25 5.7,63.758 ; S3.2@4.328,63.051 ccw(c4.618,63.76) 5.16,63.218 ; S3.2@4.424,63.286 ccw(c4.775,64.143) 5.43,63.488 ; S3.2@4.52,63.521 ccw(c4.932,64.526) 5.7,63.758 ; S3.2@5.094,62.487 cw(c6.096,62.704) 5.371,63.429 ; S3.2@5.342,62.541 cw(c6.637,62.821) 5.7,63.758
  Bottom Layer w0.381: S3.2@4.189,50.659 ccw(c4.48,52.056) 5.489,51.047 ; S3.2@4.189,61.341 cw(c4.48,59.944) 5.489,60.953 ; S3.2@4.192,49.75 5.988,51.546 ; S3.2@4.192,62.25 5.988,60.454 ; S3.2@4.267,51.032 ccw(c4.652,52.882) 5.988,51.546 ; S3.2@4.267,60.968 cw(c4.652,59.118) 5.988,60.454 ; S3.2@4.928,49.788 cw(c6.454,49.852) 5.374,50.932 ; S3.2@4.928,62.212 ccw(c6.454,62.148) 5.374,61.068 ; S3.2@5.308,49.804 cw(c7.633,49.901) 5.988,51.546 ; S3.2@5.308,62.196 ccw(c7.633,62.099) 5.988,60.454 ; 5.988,51.546 C10.1@5.988,56 5.988,60.454
KEY4: C11.1 S4.2 U1.39 | length 64.3
  Top Layer w0.254: U1.39@4.05,76.45 5.425,76.45 6.106,75.768 6.106,65.994 7.5,64.6 14.842,64.6 ; 14.984,64.458 ccw(c17,66.474) S4.2@17,63.623 ; 15.222,64.22 cw(c13.589,62.588) S4.2@15.886,62.36 ; 15.417,64.024 ccw(c17,65.607) S4.2@17,63.369 ; 15.601,63.841 cw(c14.28,62.52) S4.2@16.139,62.335 ; S4.2@15.634,62.385 ccw(c12.899,62.656) 14.842,64.6 ; 15.851,63.591 ccw(c17,64.74) S4.2@17,63.115 ; 15.98,63.462 cw(c14.97,62.451) S4.2@16.392,62.31 ; S4.2@17.192,62.25 14.842,64.6
  Bottom Layer w0.381: S4.2@17.189,50.659 ccw(c17.48,52.056) 18.489,51.047 ; S4.2@17.189,61.341 cw(c17.48,59.944) 18.489,60.953 ; S4.2@17.192,49.75 18.988,51.546 ; S4.2@17.192,62.25 18.988,60.454 ; S4.2@17.267,51.032 ccw(c17.652,52.882) 18.988,51.546 ; S4.2@17.267,60.968 cw(c17.652,59.118) 18.988,60.454 ; S4.2@17.928,49.788 cw(c19.454,49.852) 18.374,50.932 ; S4.2@17.928,62.212 ccw(c19.454,62.148) 18.374,61.068 ; S4.2@18.308,49.804 cw(c20.633,49.901) 18.988,51.546 ; S4.2@18.308,62.196 ccw(c20.633,62.099) 18.988,60.454 ; 18.988,51.546 C11.1@18.988,56 18.988,60.454
KEY5: C12.1 S5.2 U1.19 | length 86.3
  Top Layer w0.254: S5.2@-22,46.25 -20.45,46.25 ; S5.2@-20.637,46.084 cw(c-20.45,46.062) -20.45,46.25 ; S5.2@-20.637,46.416 ccw(c-20.45,46.438) -20.45,46.25 ; U1.19@-4.45,77.95 -7.474,77.95 -9.219,76.205 -9.219,66.376 -7.947,65.104 -3.81,65.104 -2.058,63.352 -2.058,52.942 -3.2,51.8 -18.2,51.8 -19.5,50.5 -19.5,47.2 -20.45,46.25
  Bottom Layer w0.381: S5.2@-21.811,34.659 ccw(c-21.52,36.056) -20.511,35.047 ; S5.2@-21.811,45.341 cw(c-21.52,43.944) -20.511,44.953 ; S5.2@-21.808,33.75 -20.012,35.546 ; S5.2@-21.808,46.25 -20.012,44.454 ; S5.2@-21.733,35.032 ccw(c-21.348,36.882) -20.012,35.546 ; S5.2@-21.733,44.968 cw(c-21.348,43.118) -20.012,44.454 ; S5.2@-21.072,33.788 cw(c-19.546,33.852) -20.626,34.932 ; S5.2@-21.072,46.212 ccw(c-19.546,46.148) -20.626,45.068 ; S5.2@-20.692,33.804 cw(c-18.367,33.901) -20.012,35.546 ; S5.2@-20.692,46.196 ccw(c-18.367,46.099) -20.012,44.454 ; -20.012,35.546 C12.1@-20.012,40.1 -20.012,44.454
KEY6: C13.1 S6.2 U1.20 | length 89.1
  Top Layer w0.254: S6.2@-8.938,45.642 cw(c-8.794,44.232) -7.792,45.234 ; S6.2@-8.912,45.389 cw(c-8.725,43.546) -7.414,44.856 ; S6.2@-8.887,45.137 cw(c-8.655,42.86) -7.036,44.478 ; S6.2@-8.861,44.884 cw(c-8.585,42.174) -6.658,44.1 ; S6.2@-8.808,46.25 -6.658,44.1 -2.9,44.1 -1.651,45.349 -1.651,63.52 -3.642,65.51 -7.779,65.51 -8.813,66.544 -8.813,76.037 -7.399,77.45 U1.20@-4.45,77.45 ; S6.2@-8.135,46.25 ccw(c-6.51,46.25) -7.659,45.101 ; S6.2@-7.881,46.25 ccw(c-5.643,46.25) -7.226,44.668 ; S6.2@-7.627,46.25 ccw(c-4.776,46.25) -6.792,44.234
  Bottom Layer w0.381: S6.2@-8.811,34.659 ccw(c-8.52,36.056) -7.511,35.047 ; S6.2@-8.811,45.341 cw(c-8.52,43.944) -7.511,44.953 ; S6.2@-8.808,33.75 -7.012,35.546 ; S6.2@-8.808,46.25 -7.012,44.454 ; S6.2@-8.733,35.032 ccw(c-8.348,36.882) -7.012,35.546 ; S6.2@-8.733,44.968 cw(c-8.348,43.118) -7.012,44.454 ; S6.2@-8.072,33.788 cw(c-6.546,33.852) -7.626,34.932 ; S6.2@-8.072,46.212 ccw(c-6.546,46.148) -7.626,45.068 ; S6.2@-7.692,33.804 cw(c-5.367,33.901) -7.012,35.546 ; S6.2@-7.692,46.196 ccw(c-5.367,46.099) -7.012,44.454 ; -7.012,35.546 C13.1@-7.012,40 -7.012,44.454
KEY7: C14.1 S7.2 U1.32 | length 68.9
  Top Layer w0.254: U1.32@0.55,73.95 0.55,66.075 1.6,65.025 1.6,48.65 S7.2@4,46.25 ; S7.2@2.627,46.25 ccw(c-0.688,46.25) 1.656,48.594 ccw(c4,50.938) S7.2@4,47.623 ; S7.2@2.881,46.25 ccw(c0.179,46.25) 2.09,48.16 ccw(c4,50.071) S7.2@4,47.369 ; S7.2@3.135,46.25 ccw(c1.047,46.25) 2.523,47.727 ccw(c4,49.203) S7.2@4,47.115 ; S7.2@4.096,46.346 S7.2@4.192,46.25
  Bottom Layer w0.381: S7.2@4.189,34.659 ccw(c4.48,36.056) 5.489,35.047 ; S7.2@4.189,45.341 cw(c4.48,43.944) 5.489,44.953 ; S7.2@4.192,33.75 5.988,35.546 ; S7.2@4.192,46.25 5.988,44.454 ; S7.2@4.267,35.032 ccw(c4.652,36.882) 5.988,35.546 ; S7.2@4.267,44.968 cw(c4.652,43.118) 5.988,44.454 ; S7.2@4.928,33.788 cw(c6.454,33.852) 5.374,34.932 ; S7.2@4.928,46.212 ccw(c6.454,46.148) 5.374,45.068 ; S7.2@5.308,33.804 cw(c7.633,33.901) 5.988,35.546 ; S7.2@5.308,46.196 ccw(c7.633,46.099) 5.988,44.454 ; 5.988,35.546 C14.1@5.988,39.9 5.988,44.454
KEY8: C15.1 S8.2 U1.33 | length 81.6
  Top Layer w0.254: U1.33@1.05,73.95 1.05,66.15 2.1,65.1 2.1,53.1 3.4,51.8 12.1,51.8 13,50.9 13,47.1 13.85,46.25 ; S8.2@15.994,45.315 ccw(c13.85,43.324) 13.85,46.25 ; S8.2@15.994,47.185 cw(c13.85,49.176) 13.85,46.25 ; S8.2@16.18,45.488 ccw(c14.433,43.865) 14.433,46.25 ccw(c14.433,48.635) S8.2@16.18,47.012 ; S8.2@16.366,45.661 ccw(c15.016,44.406) 15.016,46.25 ccw(c15.016,48.094) S8.2@16.366,46.839 ; S8.2@17.192,46.25 13.85,46.25
  Bottom Layer w0.381: S8.2@17.146,34.667 ccw(c17.405,36.296) 18.572,35.13 ; S8.2@17.146,45.333 cw(c17.405,43.704) 18.572,44.87 ; S8.2@17.192,33.75 19.1,35.658 ; S8.2@17.192,46.25 19.1,44.342 ; S8.2@17.206,35.043 ccw(c17.55,37.208) 19.1,35.658 ; S8.2@17.206,44.957 cw(c17.55,42.792) 19.1,44.342 ; S8.2@17.928,33.75 cw(c19.707,33.75) 18.449,35.007 ; S8.2@17.928,46.25 ccw(c19.707,46.25) 18.449,44.993 ; S8.2@18.309,33.75 cw(c21.007,33.75) 19.1,35.658 ; S8.2@18.309,46.25 ccw(c21.007,46.25) 19.1,44.342 ; 19.1,35.658 C15.1@19.1,39.9 19.1,44.342
KEY9: C16.1 S9.2 U1.21 | length 104.6
  Top Layer w0.254: S9.2@-21.808,30.25 -20.05,30.25 ; S9.2@-20.947,29.873 cw(c-20.411,29.681) -20.411,30.25 cw(c-20.411,30.819) S9.2@-20.947,30.627 ; S9.2@-20.707,29.787 cw(c-20.05,29.552) -20.05,30.25 ; S9.2@-20.707,30.713 ccw(c-20.05,30.948) -20.05,30.25 ; U1.21@-4.45,76.95 -7.325,76.95 -8.406,75.868 -8.406,66.713 -7.611,65.917 -3.473,65.917 -1.245,63.688 -1.245,36.955 -2.1,36.1 -18.5,36.1 -19.352,35.248 -19.352,30.948 -20.05,30.25
  Bottom Layer w0.381: S9.2@-21.811,18.659 ccw(c-21.52,20.056) -20.511,19.047 ; S9.2@-21.811,29.341 cw(c-21.52,27.944) -20.511,28.953 ; S9.2@-21.808,17.75 -20.012,19.546 C16.1@-20.012,24 -20.012,28.454 ; S9.2@-21.808,30.25 -20.012,28.454 ; S9.2@-21.733,19.032 ccw(c-21.348,20.882) -20.012,19.546 ccw(c-18.367,17.901) S9.2@-20.692,17.804 ; S9.2@-21.733,28.968 cw(c-21.348,27.118) -20.012,28.454 ; S9.2@-21.072,17.788 cw(c-19.546,17.852) -20.626,18.932 ; S9.2@-21.072,30.212 ccw(c-19.546,30.148) -20.626,29.068 ; S9.2@-20.692,30.196 ccw(c-18.367,30.099) -20.012,28.454
KEY10: C17.1 S10.2 U1.22 | length 102.4
  Top Layer w0.254: S10.2@-9,30.25 -6.95,28.2 -1.8,28.2 -0.838,29.162 -0.838,63.857 -3.305,66.323 -7.442,66.323 -8,66.881 -8,75.7 -7.25,76.45 U1.22@-4.45,76.45 ; S10.2@-8.914,29.389 cw(c-8.766,27.901) -7.709,28.959 cw(c-6.651,30.016) S10.2@-8.139,30.164 ; S10.2@-8.889,29.137 cw(c-8.697,27.211) -7.329,28.579 cw(c-5.961,29.947) S10.2@-7.887,30.139 ; S10.2@-8.864,28.884 cw(c-8.629,26.521) -6.95,28.2 cw(c-5.272,29.879) S10.2@-7.634,30.114
  Bottom Layer w0.381: S10.2@-8.811,18.659 ccw(c-8.52,20.056) -7.511,19.047 ; S10.2@-8.811,29.341 cw(c-8.52,27.944) -7.511,28.953 ; S10.2@-8.808,17.75 -7.012,19.546 C17.1@-7.012,24 -7.012,28.454 ; S10.2@-8.808,30.25 -7.012,28.454 ; S10.2@-8.733,19.032 ccw(c-8.348,20.882) -7.012,19.546 ccw(c-5.367,17.901) S10.2@-7.692,17.804 ; S10.2@-8.733,28.968 cw(c-8.348,27.118) -7.012,28.454 ; S10.2@-8.072,17.788 cw(c-6.546,17.852) -7.626,18.932 ; S10.2@-8.072,30.212 ccw(c-6.546,30.148) -7.626,29.068 ; S10.2@-7.692,30.196 ccw(c-5.367,30.099) -7.012,28.454
KEY11: C18.1 S11.2 U1.28 | length 77.7
  Top Layer w0.254: U1.28@-1.45,73.95 -1.45,66.875 0.787,64.638 0.787,31.413 1.95,30.25 S11.2@4,30.25 ; S11.2@2.73,29.727 ccw(c1.95,29.406) 1.95,30.25 ccw(c1.95,31.094) S11.2@2.73,30.773 ; S11.2@2.965,29.824 ccw(c2.329,29.562) 2.329,30.25 ccw(c2.329,30.938) S11.2@2.965,30.676
  Bottom Layer w0.381: S11.2@4.189,18.659 ccw(c4.48,20.056) 5.489,19.047 ; S11.2@4.189,29.341 cw(c4.48,27.944) 5.489,28.953 ; S11.2@4.192,17.75 5.988,19.546 C18.1@5.988,24 5.988,28.454 ; S11.2@4.192,30.25 5.988,28.454 ; S11.2@4.267,19.032 ccw(c4.652,20.882) 5.988,19.546 ccw(c7.633,17.901) S11.2@5.308,17.804 ; S11.2@4.267,28.968 cw(c4.652,27.118) 5.988,28.454 ; S11.2@4.928,17.788 cw(c6.454,17.852) 5.374,18.932 ; S11.2@4.928,30.212 ccw(c6.454,30.148) 5.374,29.068 ; S11.2@5.308,30.196 ccw(c7.633,30.099) 5.988,28.454
KEY12: C19.1 S12.2 U1.29 | length 94.6
  Top Layer w0.254: U1.29@-0.95,73.95 -0.95,66.95 1.194,64.806 1.194,37.1 2.194,36.1 12.5,36.1 13.5,35.1 13.5,31.1 14.35,30.25 ; S12.2@15.878,29.458 ccw(c14.35,28.379) 14.35,30.25 ; S12.2@15.878,31.042 cw(c14.35,32.121) 14.35,30.25 ; S12.2@16.086,29.605 ccw(c14.84,28.725) 14.84,30.25 ccw(c14.84,31.775) S12.2@16.086,30.895 ; S12.2@16.293,29.751 ccw(c15.331,29.072) 15.331,30.25 ccw(c15.331,31.428) S12.2@16.293,30.749 ; S12.2@17.192,30.25 14.35,30.25
  Bottom Layer w0.381: S12.2@17.189,18.659 ccw(c17.48,20.056) 18.489,19.047 ; S12.2@17.189,29.341 cw(c17.48,27.944) 18.489,28.953 ; S12.2@17.192,17.75 18.988,19.546 C19.1@18.988,24 18.988,28.454 ; S12.2@17.192,30.25 18.988,28.454 ; S12.2@17.267,19.032 ccw(c17.652,20.882) 18.988,19.546 ccw(c20.633,17.901) S12.2@18.308,17.804 ; S12.2@17.267,28.968 cw(c17.652,27.118) 18.988,28.454 ; S12.2@17.928,17.788 cw(c19.454,17.852) 18.374,18.932 ; S12.2@17.928,30.212 ccw(c19.454,30.148) 18.374,29.068 ; S12.2@18.308,30.196 ccw(c20.633,30.099) 18.988,28.454
KEY13: C20.1 S13.2 U1.25 | length 109.3
  Top Layer w0.254: S13.2@-15.5,13.25 -13,15.75 ; S13.2@-15.334,14.566 ccw(c-14.796,15.592) -13.977,14.773 ; S13.2@-15.216,14.791 ccw(c-14.628,15.913) -13.733,15.017 ; S13.2@-15.098,15.016 ccw(c-14.46,16.233) -13.488,15.262 ; S13.2@-14.98,15.241 ccw(c-14.292,16.554) -13.244,15.506 ; S13.2@-14.863,15.466 ccw(c-14.124,16.874) -13,15.75 ; S13.2@-14.127,14.25 cw(c-13.227,14.25) -13.863,14.887 ; U1.25@-2.95,73.95 -2.95,66.651 -0.432,64.133 -0.432,21.268 -1.6,20.1 -12.1,20.1 -13,19.2 -13,15.75
  Bottom Layer w0.381: S13.2@-15.5,1.75 -13.704,3.546 ; S13.2@-15.5,14.25 -13.704,12.454 ; S13.2@-15.346,2.666 ccw(c-15.133,3.93) -14.227,3.023 ccw(c-13.32,2.117) S13.2@-14.584,1.904 ; S13.2@-15.346,13.334 cw(c-15.133,12.07) -14.227,12.977 cw(c-13.32,13.883) S13.2@-14.584,14.096 ; S13.2@-15.283,3.041 ccw(c-14.983,4.825) -13.704,3.546 ; S13.2@-15.283,12.959 cw(c-14.983,11.175) -13.704,12.454 ; S13.2@-14.209,1.967 cw(c-12.425,2.267) -13.704,3.546 ; S13.2@-14.209,14.033 ccw(c-12.425,13.733) -13.704,12.454 ; -13.704,3.546 C20.1@-13.704,8 -13.704,12.454
KEY14: C21.1 S14.2 U1.26 | length 101.2
  Top Layer w0.254: S14.2@-2.5,14.1 -0.026,16.574 ; S14.2@-2.478,14.861 ccw(c-2.418,16.494) -1.262,15.338 ; S14.2@-2.468,15.114 ccw(c-2.388,17.289) -0.85,15.75 ; S14.2@-2.459,15.368 ccw(c-2.359,18.084) -0.438,16.162 ; S14.2@-2.45,15.622 ccw(c-2.33,18.878) -0.026,16.574 ; U1.26@-2.45,73.95 -2.45,66.726 -0.026,64.301 -0.026,16.574 ; S14.2@-1.635,14.25 cw(c0.091,14.25) -1.129,15.471 ; S14.2@-1.381,14.25 cw(c0.958,14.25) -0.696,15.904 ; S14.2@-1.127,14.25 cw(c1.826,14.25) -0.262,16.338
  Bottom Layer w0.381: S14.2@-2.5,1.75 -0.704,3.546 ; S14.2@-2.5,14.25 -0.704,12.454 ; S14.2@-2.346,2.666 ccw(c-2.133,3.93) -1.227,3.023 ccw(c-0.32,2.117) S14.2@-1.584,1.904 ; S14.2@-2.346,13.334 cw(c-2.133,12.07) -1.227,12.977 cw(c-0.32,13.883) S14.2@-1.584,14.096 ; S14.2@-2.283,3.041 ccw(c-1.983,4.825) -0.704,3.546 ; S14.2@-2.283,12.959 cw(c-1.983,11.175) -0.704,12.454 ; S14.2@-1.209,1.967 cw(c0.575,2.267) -0.704,3.546 ; S14.2@-1.209,14.033 ccw(c0.575,13.733) -0.704,12.454 ; -0.704,3.546 C21.1@-0.704,8 -0.704,12.454
KEY15: C22.1 S15.2 U1.27 | length 105.9
  Top Layer w0.254: U1.27@-1.95,73.95 -1.95,66.801 0.381,64.47 0.381,21.519 1.6,20.3 5.5,20.3 6.3,19.5 6.3,15.4 7.45,14.25 ; S15.2@9.472,13.34 ccw(c7.45,11.549) 7.45,14.25 ; S15.2@9.472,15.16 cw(c7.45,16.951) 7.45,14.25 ; S15.2@9.662,13.508 ccw(c8.014,12.049) 8.014,14.25 ccw(c8.014,16.451) S15.2@9.662,14.992 ; S15.2@9.852,13.677 ccw(c8.579,12.549) 8.579,14.25 ccw(c8.579,15.951) S15.2@9.852,14.823 ; S15.2@10.5,14.25 7.45,14.25
  Bottom Layer w0.381: S15.2@10.5,1.75 12.296,3.546 ; S15.2@10.5,14.25 12.296,12.454 ; S15.2@10.654,2.666 ccw(c10.867,3.93) 11.773,3.023 ccw(c12.68,2.117) S15.2@11.416,1.904 ; S15.2@10.654,13.334 cw(c10.867,12.07) 11.773,12.977 cw(c12.68,13.883) S15.2@11.416,14.096 ; S15.2@10.717,3.041 ccw(c11.017,4.825) 12.296,3.546 ; S15.2@10.717,12.959 cw(c11.017,11.175) 12.296,12.454 ; S15.2@11.791,1.967 cw(c13.575,2.267) 12.296,3.546 ; S15.2@11.791,14.033 ccw(c13.575,13.733) 12.296,12.454 ; 12.296,3.546 C22.1@12.296,8 12.296,12.454
LEDKEY: R1.2 U1.43 | length 26.9
  Top Layer w0.254: R1.2@-10.907,90.862 cw(c-11.287,90.482) -10.749,90.482 cw(c-10.211,90.482) R1.2@-10.591,90.862 ; R1.2@-10.749,91.02 -10.749,86.14 v1(-10.033,85.424) ; v1@-10.16,85.424 ccw(c-10.467,85.424) -10.25,85.641 ccw(c-10.033,85.858) v1@-10.033,85.551 ; v1(1.016,78.439) 4.039,78.439 U1.43@4.05,78.45 ; v1@1.106,78.349 cw(c1.323,78.132) 1.323,78.439 cw(c1.323,78.746) v1@1.106,78.529
  Bottom Layer w0.254: v1@-10.033,85.297 cw(c-10.033,84.99) -9.816,85.207 cw(c-9.599,85.424) v1@-9.906,85.424 ; v1(-10.033,85.424) -6.299,81.69 -0.076,81.69 0.381,81.233 0.381,79.074 v1(1.016,78.439) ; v1@0.889,78.439 ccw(c0.582,78.439) 0.799,78.656 ccw(c1.016,78.873) v1@1.016,78.566
LEDPOW: R2.2 U1.45 | length 24.6
  Top Layer w0.254: R2.2@-8.886,90.862 cw(c-9.267,90.482) -8.729,90.482 cw(c-8.19,90.482) R2.2@-8.571,90.862 ; R2.2@-8.729,91.02 -8.729,85.898 v1(-8.255,85.424) ; v1@-8.382,85.424 ccw(c-8.689,85.424) -8.472,85.641 ccw(c-8.255,85.858) v1@-8.255,85.551 ; v1(1.27,79.201) 2.667,79.201 2.916,79.45 U1.45@4.05,79.45 ; v1@1.36,79.111 cw(c1.577,78.894) 1.577,79.201 cw(c1.577,79.508) v1@1.36,79.291
  Bottom Layer w0.254: v1@-8.255,85.297 cw(c-8.255,84.99) -8.038,85.207 cw(c-7.821,85.424) v1@-8.128,85.424 ; v1(-8.255,85.424) -4.928,82.097 0.092,82.097 0.787,81.401 0.787,79.684 v1(1.27,79.201) ; v1@1.143,79.201 ccw(c0.836,79.201) 1.053,79.418 ccw(c1.27,79.635) v1@1.27,79.328
LEDTEST: R3.2 U1.46 | length 22.1
  Top Layer w0.254: R3.2@-6.866,90.862 cw(c-7.247,90.482) -6.708,90.482 cw(c-6.17,90.482) R3.2@-6.551,90.862 ; v1@-6.821,85.514 ccw(c-7.092,85.785) -6.708,85.785 ; v1(-6.731,85.424) -6.708,85.447 R3.2@-6.708,91.02 ; v1(1.524,79.861) 1.613,79.95 U1.46@4.05,79.95 ; v1@1.614,79.772 cw(c2.045,79.341) 2.045,79.95
  Bottom Layer w0.254: v1@-6.731,85.297 cw(c-6.731,84.99) -6.514,85.207 cw(c-6.297,85.424) v1@-6.604,85.424 ; v1(-6.731,85.424) -3.81,82.503 0.26,82.503 1.194,81.57 1.194,80.166 1.499,79.861 v1(1.524,79.861) ; 1.264,80.096 ccw(c1.524,80.356) v1@1.524,79.988 ; 1.325,80.035 cw(c1.152,79.861) v1@1.397,79.861
NetC29_1: C29.1 R20.2 R22.1 U3.4 | length 5.6
  Bottom Layer w0.508: R20.2@-0.976,90.719 R22.1@0.624,90.719 C29.1@2.324,90.719 2.474,90.569 U3.4@4.099,90.569 ; C29.1@2.507,90.752 ccw(c2.947,91.192) 2.947,90.569
NetD1_2: D1.2 R1.1 | length 3.7
  Top Layer w0.305: D1.2@-10.924,94.428 cw(c-11.347,94.005) -10.749,94.005 cw(c-10.151,94.005) D1.2@-10.574,94.428 ; R1.1@-10.889,92.76 ccw(c-11.226,93.097) -10.749,93.097 ccw(c-10.272,93.097) R1.1@-10.609,92.76 ; R1.1@-10.749,92.62 D1.2@-10.749,94.603
NetD2_2: D2.2 R2.1 | length 3.7
  Top Layer w0.305: D2.2@-8.904,94.428 cw(c-9.326,94.005) -8.729,94.005 cw(c-8.131,94.005) D2.2@-8.554,94.428 ; R2.1@-8.868,92.76 ccw(c-9.206,93.097) -8.729,93.097 ccw(c-8.252,93.097) R2.1@-8.589,92.76 ; R2.1@-8.729,92.62 D2.2@-8.729,94.603
NetD3_2: D3.2 R3.1 | length 3.7
  Top Layer w0.305: D3.2@-6.883,94.428 cw(c-7.306,94.005) -6.708,94.005 cw(c-6.111,94.005) D3.2@-6.533,94.428 ; R3.1@-6.848,92.76 ccw(c-7.185,93.097) -6.708,93.097 ccw(c-6.231,93.097) R3.1@-6.569,92.76 ; R3.1@-6.708,92.62 D3.2@-6.708,94.603
NetD4_2: D4.2 R12.2 | length 2.6
  Bottom Layer w0.508: D4.2@-11.3,93.9 -11.14,94.06 R12.2@-9.309,94.06 ; D4.2@-11.197,94.253 ccw(c-10.73,94.72) -10.73,94.06
NetJ2_3: J2.3 R7.2 | length 10.8
  Top Layer w0.254: J2.3@-26,80.8 R7.2@-17.8,80.8 ; J2.3@-25.666,80.466 cw(c-24.858,79.658) -24.858,80.8 cw(c-24.858,81.942) J2.3@-25.666,81.134 ; R7.2@-17.958,80.642 ccw(c-18.338,80.262) -18.338,80.8 ccw(c-18.338,81.338) R7.2@-17.958,80.958
NetJ2_4: J2.4 R8.2 | length 10.8
  Top Layer w0.254: J2.4@-26,82.3 R8.2@-17.8,82.3 ; J2.4@-25.666,81.966 cw(c-24.858,81.158) -24.858,82.3 cw(c-24.858,83.442) J2.4@-25.666,82.634 ; R8.2@-17.958,82.142 ccw(c-18.338,81.762) -18.338,82.3 ccw(c-18.338,82.838) R8.2@-17.958,82.458
NetJ2_5: J2.5 R9.2 | length 10.8
  Top Layer w0.254: J2.5@-26,83.8 R9.2@-17.8,83.8 ; J2.5@-25.666,83.466 cw(c-24.858,82.658) -24.858,83.8 cw(c-24.858,84.942) J2.5@-25.666,84.134 ; R9.2@-17.958,83.642 ccw(c-18.338,83.262) -18.338,83.8 ccw(c-18.338,84.338) R9.2@-17.958,83.958
NetJ2_6: J2.6 R10.2 | length 10.7
  Top Layer w0.254: J2.6@-26,85.3 R10.2@-17.9,85.3 ; J2.6@-25.666,84.966 cw(c-24.858,84.158) -24.858,85.3 cw(c-24.858,86.442) J2.6@-25.666,85.634 ; R10.2@-17.958,85.142 ccw(c-18.338,84.762) -18.338,85.3 ccw(c-18.338,85.838) R10.2@-17.958,85.458
NetJ2_7: J2.7 R11.2 | length 10.8
  Top Layer w0.254: J2.7@-26,86.8 R11.2@-17.8,86.8 ; J2.7@-25.666,86.466 cw(c-24.858,85.658) -24.858,86.8 cw(c-24.858,87.942) J2.7@-25.666,87.134 ; R11.2@-17.958,86.642 ccw(c-18.338,86.262) -18.338,86.8 ccw(c-18.338,87.338) R11.2@-17.958,86.958
NetQ1_1: Q1.1 R14.2 R15.1 | length 7
  Bottom Layer w0.508: R14.2@-2.476,97.9 R15.1@-2.476,96.3 -1.642,96.3 Q1.1@-0.092,94.75 ; -1.604,96.262 cw(c-3.117,94.75) Q1.1@-0.978,94.75 ; -0.737,95.395 cw(c-1.383,94.75) Q1.1@-0.47,94.75
NetQ2_1: Q2.1 R16.2 R17.1 | length 8.6
  Bottom Layer w0.305: Q2.1@22.2,92.25 Q2.1@22.338,92.112
  Bottom Layer w0.381: Q2.1@22.338,92.112 24.2,92.112 R16.2@25.9,92.112 ; Q2.1@22.349,92.407 ccw(c23.062,93.12) 23.062,92.112 ; Q2.1@22.619,92.676 ccw(c23.982,94.039) R17.1@23.982,92.112 ; 23.214,92.112 ccw(c23.214,93.205) R17.1@23.987,92.432 ; R17.1@24.413,92.432 ccw(c25.186,93.205) 25.186,92.112 ; 24.914,92.112 ccw(c24.914,93.205) R16.2@25.687,92.432
NetQ2_3: Q2.3 Q3.3 R15.2 | length 42
  Bottom Layer w0.305: R15.2@-2.483,94.704 ccw(c-1.771,94.68) -2.275,94.176 ; R15.2@-2.476,94.7 -2.476,94.377 -1.778,93.679 ; R15.2@-2.179,94.693 ccw(c-0.809,94.648) -1.778,93.679 ; Q3.3@17.954,91.776 ccw(c17.361,92.37) 18.2,92.37 ccw(c19.039,92.37) Q3.3@18.446,91.776 ; Q3.3@18.646,91.285 cw(c19.183,90.747) 19.183,91.507 ; Q3.3@18.646,91.776 ccw(c19.295,92.426) 19.295,91.507 ; Q2.3@19.554,91.262 ccw(c18.961,90.668) 18.961,91.507 ccw(c18.961,92.347) Q2.3@19.554,91.753 ; Q2.3@20,91.507 18.223,91.507 Q3.3@18.2,91.531 18.2,92.6 17.3,93.5 12.4,93.5 11.45,94.45 11.45,99.95 11.168,100.232 2.616,100.232 1.905,99.521 1.905,94.187 1.397,93.679 -1.778,93.679
NetQ3_1: Q3.1 R18.2 R19.1 | length 6.5
  Bottom Layer w0.381: R18.2@12.2,90.719 R19.1@14,90.719 15.631,90.719 Q3.1@15.85,90.5 ; R18.2@12.413,90.606 cw(c12.685,90.334) 12.685,90.719 cw(c12.685,91.104) R18.2@12.413,90.832 ; R19.1@13.787,90.606 ccw(c13.515,90.334) 13.515,90.719 ccw(c13.515,91.104) R19.1@13.787,90.832 ; R19.1@14.213,90.606 cw(c14.485,90.334) 14.485,90.719 cw(c14.485,91.104) R19.1@14.213,90.832 ; 14.719,90.719 cw(c14.719,89.499) Q3.1@15.581,90.362
NetQ4_1: Q4.1 R27.1 R29.2 | length 6.2
  Top Layer w0.381: R27.1@15.55,84.85 Q4.1@19.3,84.85 ; R27.1@15.713,84.687 cw(c16.106,84.294) 16.106,84.85 ; 16.694,84.85 cw(c16.694,84.294) R29.2@17.087,84.687 ; R29.2@17.513,84.687 cw(c17.906,84.294) 17.906,84.85 ; Q4.1@18.881,84.631 ccw(c18.353,84.103) 18.353,84.85 ccw(c18.353,85.597) Q4.1@18.881,85.069
NetQ5_1: Q5.1 R30.1 R31.2 | length 7.8
  Top Layer w0.305: R30.1@15.494,72.94 15.672,72.94 R31.2@17.272,74.54 17.422,74.69 Q5.1@19.347,74.69 ; R30.1@15.594,73.138 ccw(c15.594,73.803) 16.064,73.332 ; 16.764,74.032 ccw(c16.256,74.54) R31.2@16.974,74.54 ; R31.2@17.512,74.4 cw(c18.211,73.701) 18.211,74.69 ; Q5.1@18.901,74.444 ccw(c18.308,73.851) 18.308,74.69 ccw(c18.308,75.529) Q5.1@18.901,74.936
NetR4_1: R4.1 R5.2 | length 3.7
  Top Layer w0.305: R4.1@-12.902,92.887 ccw(c-13.239,93.224) -12.762,93.224 ccw(c-12.285,93.224) R4.1@-12.622,92.887 ; R5.2@-12.902,94.79 cw(c-13.239,94.453) -12.762,94.453 cw(c-12.285,94.453) R5.2@-12.622,94.79 ; R4.1@-12.762,92.747 R5.2@-12.762,94.93
NetR12_1: R12.1 U2.1 | length 7.9
  Bottom Layer w0.305: U2.1@-9.754,90.104 ccw(c-10.006,90.356) -9.65,90.356 ccw(c-9.294,90.356) U2.1@-9.546,90.104 ; U2.1@-9.65,89.775 -9.65,90.629 -10.541,91.52 -10.541,92.917 -10.287,93.171 -8.598,93.171 R12.1@-7.709,94.06 ; -8.217,93.552 cw(c-7.709,93.044) R12.1@-7.709,93.762
NetR13_2: R13.2 U2.5 | length 2.6
  Bottom Layer w0.508: U2.5@-9.65,92.225 -8.625,92.225 R13.2@-7.8,91.4 ; R13.2@-8.135,91.735 cw(c-8.469,91.4) R13.2@-7.996,91.4
NetR16_1: R16.1 S16.1 | length 20.2
  Bottom Layer w0.254: S16.1@18.52,99.65 cw(c17.402,99.498) 18.2,98.7 ; S16.1@18.772,99.685 cw(c18.039,99.585) 18.562,99.062 cw(c19.085,98.539) S16.1@19.185,99.272 ; S16.1@19.15,99.02 ccw(c18.998,97.902) 18.2,98.7 ; S16.1@19.25,99.75 18.2,98.7 ; 25.349,91.27 cw(c24.797,90.719) R16.1@25.577,90.719 ; R16.1@25.59,91.029 ccw(c25.8,91.239) R16.1@25.8,90.942 ; R16.1@25.796,90.615 R16.1@25.9,90.512 ; R16.1@25.9,90.719 25.119,91.5 21.4,91.5 21.1,91.8 21.1,92.4 20.7,92.8 19.1,92.8 18.2,93.7 18.2,98.7
NRST: C5.1 U1.7 | length 5.1
  Top Layer w0.254: C5.1@-0.922,84.828 cw(c-2.063,83.687) -0.45,83.687 ; C5.1@-0.8,85.1 -0.45,84.75 ; C5.1@-0.743,85.007 cw(c-1.449,84.301) -0.45,84.301 ; C5.1@-0.723,84.795 cw(c-0.618,84.582) -0.45,84.75 ; U1.7@-0.45,82.45 -0.45,84.75